# Altium PCB emulator_adapter.PcbDoc
Units mil, origin at the board's own origin, x right, y up, seen from the top; angles counter-clockwise.
Board outline 1696.85 x 4409.45 mil, 4 copper layers (Top Layer, Internal Plane 1, Internal Plane 2, Bottom Layer); 7 components, 53 nets, 163 pads, 79 vias.
Unrouted connection lines stored in the file: 56.
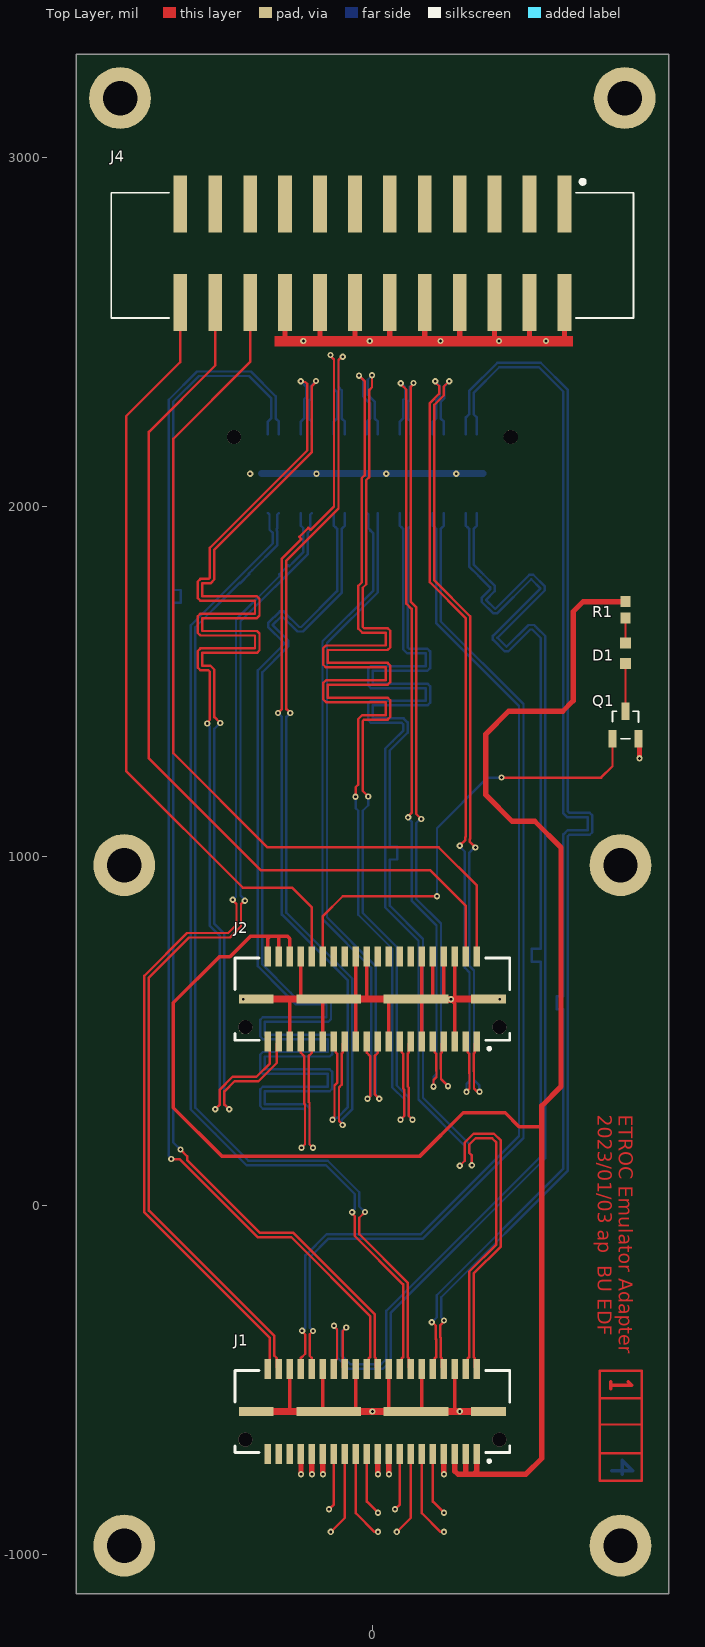
[diagram p0: Top Layer view]
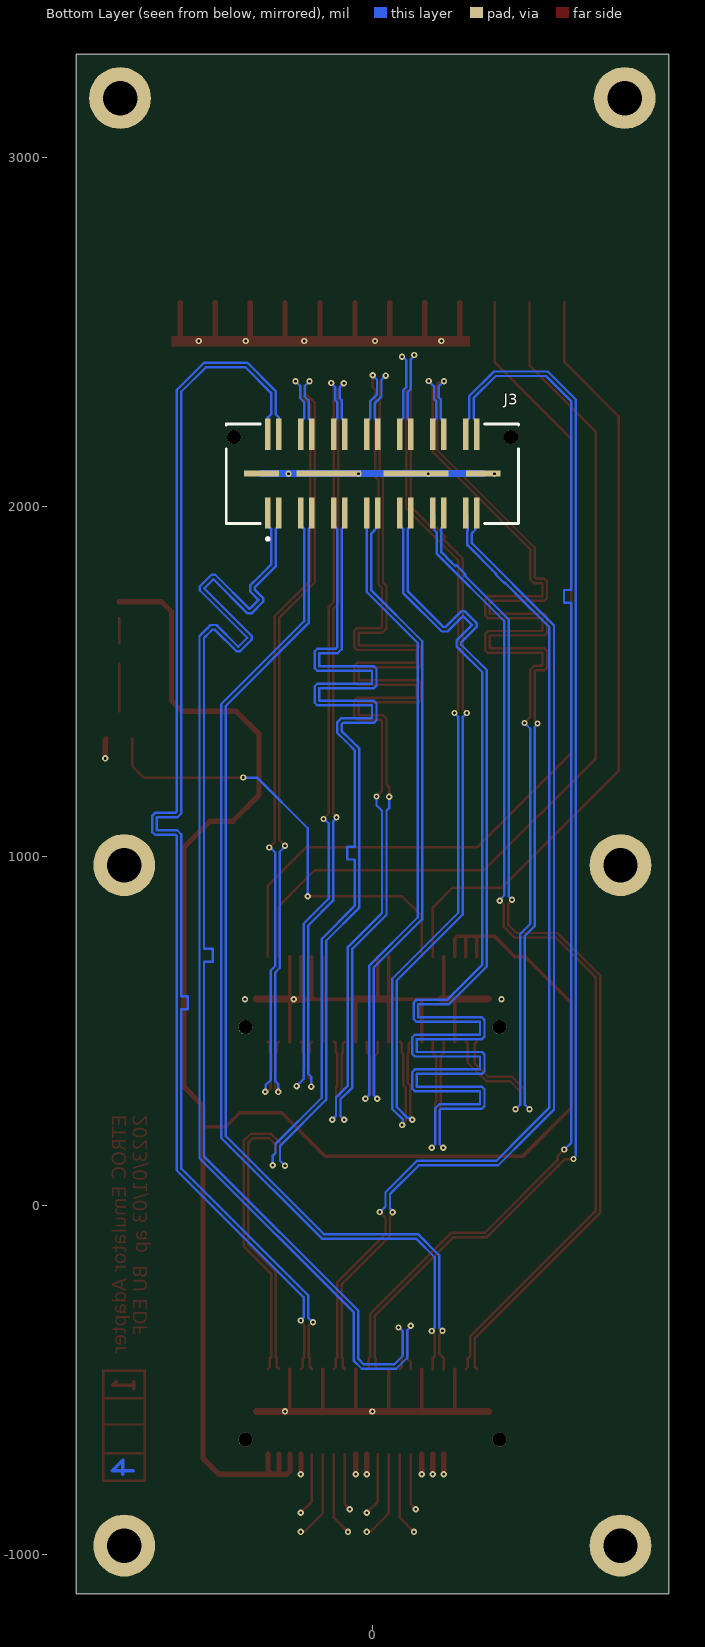
[diagram p1: Bottom Layer view, seen from below]
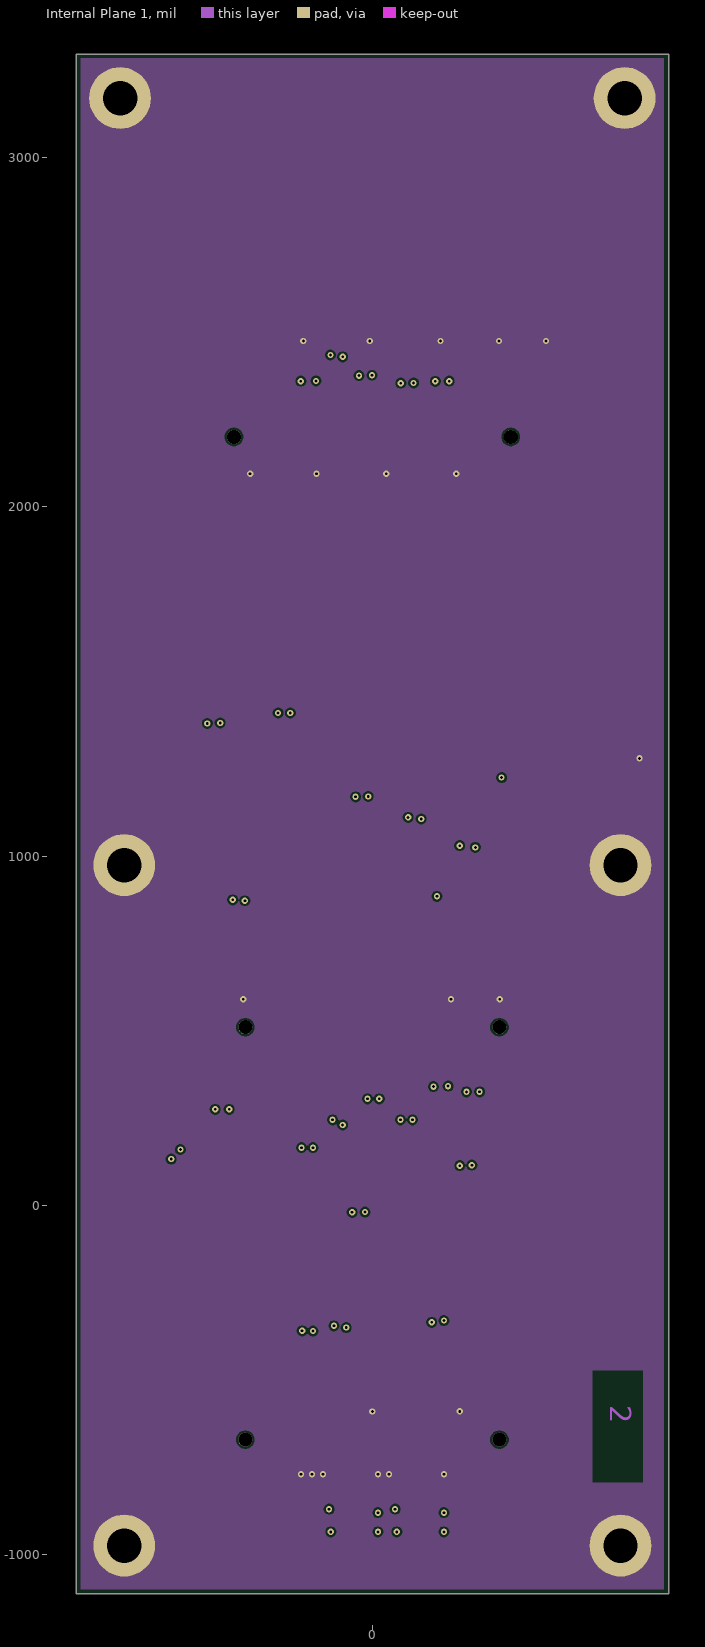
[diagram p2: Internal Plane 1]
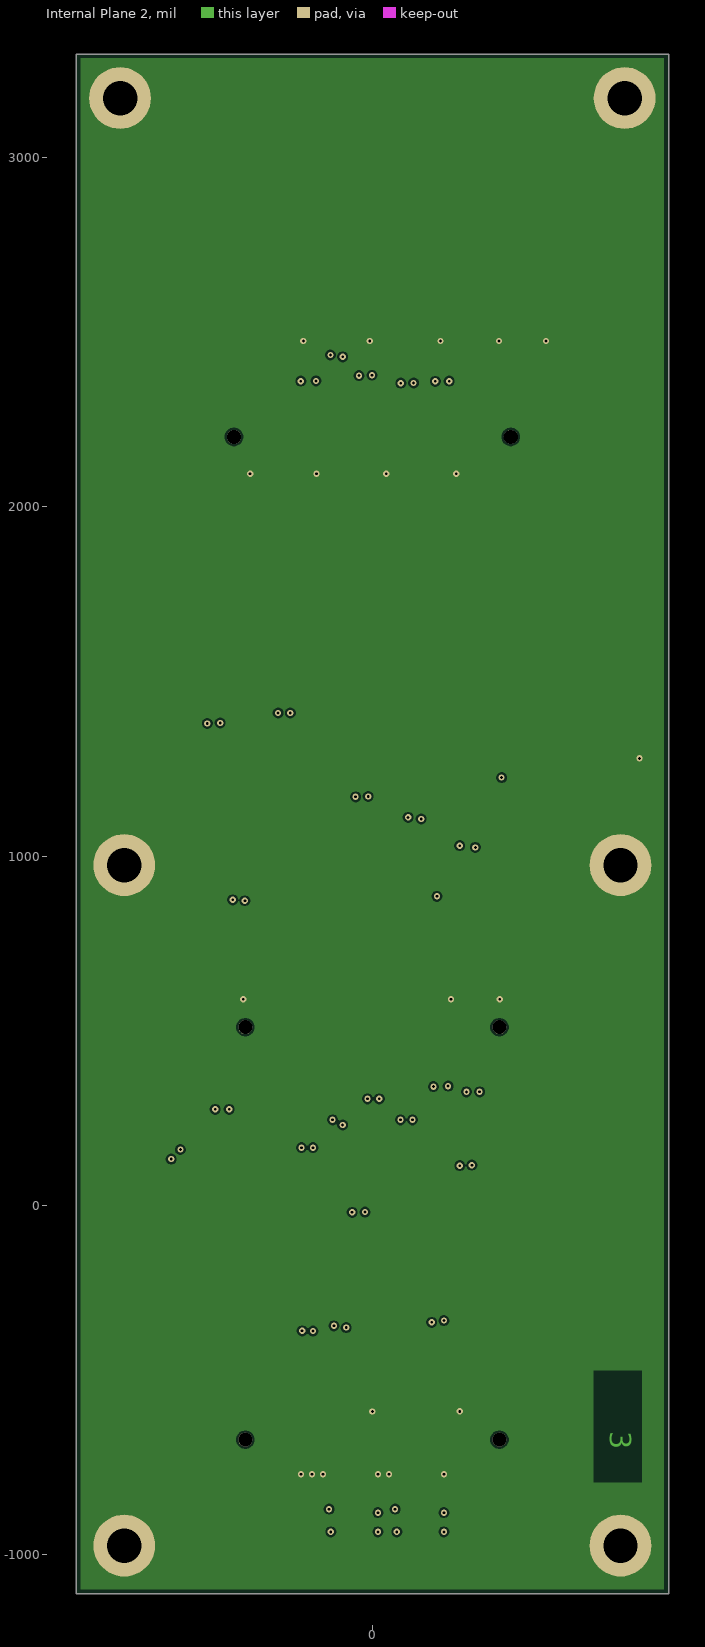
[diagram p3: Internal Plane 2]
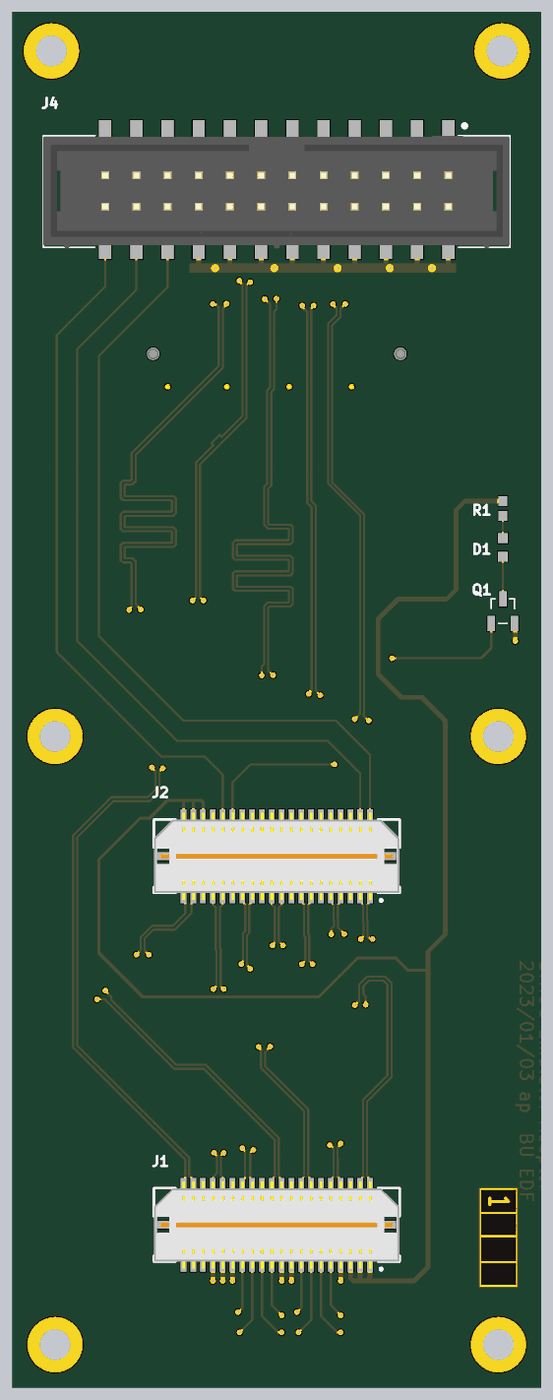
[diagram p4: 3D render of the assembled board from above, using the file's embedded part models]

## Layer stack, top to bottom
Top Solder: solder mask 0.4, Solder Resist, Dk 3.5
Top Layer: signal copper 1.4
Dielectric 1: dielectric 12.6, FR-4, Dk 4.8
Internal Plane 1: signal copper 1.4
Dielectric 2: dielectric 12.6, FR-4, Dk 4.8
Internal Plane 2: signal copper 1.4
Dielectric 3: dielectric 12.6, FR-4, Dk 4.8
Bottom Layer: signal copper 1.4
Bottom Solder: solder mask 0.4, Solder Resist, Dk 3.5

## Board outline
-848.42,-1112.68 848.43,-1112.68 848.43,3296.77 -848.42,3296.77

## Design rules (kind name [scope] priority, off if disabled: settings)
Clearance [All] p1: gap=6 ignorepadtopadclearanceinfootprint=TRUE
DiffPairsRouting [All] p1: maxlimit=10 minlimit=6 mostfreqgap=10 toplayer_maxgap=6 toplayer_prefgap=6 toplayer_minwidth=6.89 toplayer_maxwidth=6.89 toplayer_prefwidth=6.89 midlayer1_mingap=10 midlayer1_minwidth=15 midlayer1_maxwidth=15 midlayer1_prefwidth=15 midlayer2_mingap=10 midlayer2_minwidth=15 midlayer2_maxwidth=15 midlayer2_prefwidth=15 bottomlayer_maxgap=6 bottomlayer_prefgap=6 bottomlayer_minwidth=6.89 bottomlayer_maxwidth=6.89 bottomlayer_prefwidth=6.89 maxuncoupledlength=500
MatchedLengths "Diff Pairs" [All] p1: tolerance=25 checknetsindiffpair=TRUE checkdiffpairvsdiffpair=FALSE checkxsignals=FALSE checkothers=FALSE
MatchedLengths Downlinks [InNet('dout*')  OR InNet('clk*')] p2: tolerance=100 checknetsindiffpair=FALSE checkdiffpairvsdiffpair=TRUE checkxsignals=TRUE checkothers=TRUE
MinimumSolderMaskSliver [All] p1: minsoldermaskwidth=5
NetAntennae [Not(InNet('a0') or InNet('a1') or InNet('a2') or InNet('a3') or InNet('a4') or InNet('a5') or InNet('a6') or InNet('a7') or InNet('d0') or InNet('d1') or InNet('d2') or InNet('d3') or InNet('d4') or InNet('d5') or InNet('d6') or InNet('d7') )] p1: netantennaetolerance=0
PlaneConnect CAM_$Net_26 [InNet('$Net0')] p1: pad.planeconnectstyle=Relief pad.reliefexpansion=15 pad.reliefentries=4 pad.reliefconductorwidth=10 pad.reliefairgap=10 via.planeconnectstyle=Relief via.reliefexpansion=20 via.reliefentries=4 via.reliefconductorwidth=10 via.reliefairgap=10
PlaneConnect CAM_$Net_25 [InNet('$Net0')] p2: pad.planeconnectstyle=Relief pad.reliefexpansion=15 pad.reliefentries=4 pad.reliefconductorwidth=10 pad.reliefairgap=10 via.planeconnectstyle=Relief via.reliefexpansion=20 via.reliefentries=4 via.reliefconductorwidth=10 via.reliefairgap=10
PlaneConnect CAM_$Net_24 [InNet('$Net0')] p3: planeconnectstyle=Relief reliefexpansion=20 reliefentries=4 reliefconductorwidth=10 reliefairgap=10
PlaneConnect CAM_$Net_23 [InNet('$Net0')] p4: pad.planeconnectstyle=Relief pad.reliefexpansion=15 pad.reliefentries=4 pad.reliefconductorwidth=10 pad.reliefairgap=10 via.planeconnectstyle=Relief via.reliefexpansion=20 via.reliefentries=4 via.reliefconductorwidth=10 via.reliefairgap=10
PlaneConnect CAM_$Net_22 [InNet('$Net0')] p5: pad.planeconnectstyle=Relief pad.reliefexpansion=15 pad.reliefentries=4 pad.reliefconductorwidth=10 pad.reliefairgap=10 via.planeconnectstyle=Relief via.reliefexpansion=20 via.reliefentries=4 via.reliefconductorwidth=10 via.reliefairgap=10
PlaneConnect CAM_$Net_21 [InNet('$Net0')] p6: planeconnectstyle=Relief reliefexpansion=20 reliefentries=4 reliefconductorwidth=10 reliefairgap=10
PlaneConnect CAM_$Net_20 [InNet('$Net0')] p7: pad.planeconnectstyle=Relief pad.reliefexpansion=15 pad.reliefentries=4 pad.reliefconductorwidth=10 pad.reliefairgap=10 via.planeconnectstyle=Relief via.reliefexpansion=20 via.reliefentries=4 via.reliefconductorwidth=10 via.reliefairgap=10
PlaneConnect CAM_$Net_19 [InNet('$Net0')] p8: pad.planeconnectstyle=Relief pad.reliefexpansion=15 pad.reliefentries=4 pad.reliefconductorwidth=10 pad.reliefairgap=10 via.planeconnectstyle=Relief via.reliefexpansion=20 via.reliefentries=4 via.reliefconductorwidth=10 via.reliefairgap=10
PlaneConnect CAM_$Net_18 [InNet('$Net0')] p9: planeconnectstyle=Relief reliefexpansion=20 reliefentries=4 reliefconductorwidth=10 reliefairgap=10
PlaneConnect CAM_$Net_17 [InNet('$Net0')] p10: pad.planeconnectstyle=Relief pad.reliefexpansion=15 pad.reliefentries=4 pad.reliefconductorwidth=10 pad.reliefairgap=10 via.planeconnectstyle=Relief via.reliefexpansion=20 via.reliefentries=4 via.reliefconductorwidth=10 via.reliefairgap=10
PlaneConnect CAM_$Net_16 [InNet('$Net0')] p11: pad.planeconnectstyle=Relief pad.reliefexpansion=15 pad.reliefentries=4 pad.reliefconductorwidth=10 pad.reliefairgap=10 via.planeconnectstyle=Relief via.reliefexpansion=20 via.reliefentries=4 via.reliefconductorwidth=10 via.reliefairgap=10
PlaneConnect CAM_$Net_15 [InNet('$Net0')] p12: planeconnectstyle=Relief reliefexpansion=20 reliefentries=4 reliefconductorwidth=10 reliefairgap=10
PlaneConnect CAM_$Net_14 [InNet('$Net0')] p13: pad.planeconnectstyle=Relief pad.reliefexpansion=15 pad.reliefentries=4 pad.reliefconductorwidth=10 pad.reliefairgap=10 via.planeconnectstyle=Relief via.reliefexpansion=20 via.reliefentries=4 via.reliefconductorwidth=10 via.reliefairgap=10
PlaneConnect CAM_$Net_13 [InNet('$Net0')] p14: pad.planeconnectstyle=Relief pad.reliefexpansion=15 pad.reliefentries=4 pad.reliefconductorwidth=10 pad.reliefairgap=10 via.planeconnectstyle=Relief via.reliefexpansion=20 via.reliefentries=4 via.reliefconductorwidth=10 via.reliefairgap=10
PlaneConnect CAM_$Net_12 [InNet('$Net0')] p15: planeconnectstyle=Relief reliefexpansion=20 reliefentries=4 reliefconductorwidth=10 reliefairgap=10
PlaneConnect CAM_$Net_11 [InNet('$Net0')] p16: pad.planeconnectstyle=Relief pad.reliefexpansion=15 pad.reliefentries=4 pad.reliefconductorwidth=10 pad.reliefairgap=10 via.planeconnectstyle=Relief via.reliefexpansion=20 via.reliefentries=4 via.reliefconductorwidth=10 via.reliefairgap=10
PlaneConnect CAM_$Net_10 [InNet('$Net0')] p17: pad.planeconnectstyle=Relief pad.reliefexpansion=15 pad.reliefentries=4 pad.reliefconductorwidth=10 pad.reliefairgap=10 via.planeconnectstyle=Relief via.reliefexpansion=20 via.reliefentries=4 via.reliefconductorwidth=10 via.reliefairgap=10
PlaneConnect CAM_$Net_9 [InNet('$Net0')] p18: planeconnectstyle=Relief reliefexpansion=20 reliefentries=4 reliefconductorwidth=10 reliefairgap=10
PlaneConnect CAM_$Net_8 [InNet('$Net0')] p19: pad.planeconnectstyle=Relief pad.reliefexpansion=15 pad.reliefentries=4 pad.reliefconductorwidth=10 pad.reliefairgap=10 via.planeconnectstyle=Relief via.reliefexpansion=20 via.reliefentries=4 via.reliefconductorwidth=10 via.reliefairgap=10
PlaneConnect CAM_$Net_7 [InNet('$Net0')] p20: pad.planeconnectstyle=Relief pad.reliefexpansion=15 pad.reliefentries=4 pad.reliefconductorwidth=10 pad.reliefairgap=10 via.planeconnectstyle=Relief via.reliefexpansion=20 via.reliefentries=4 via.reliefconductorwidth=10 via.reliefairgap=10
PlaneConnect CAM_$Net_6 [InNet('$Net0')] p21: planeconnectstyle=Relief reliefexpansion=20 reliefentries=4 reliefconductorwidth=10 reliefairgap=10
PlaneConnect CAM_$Net_5 [InNet('$Net0')] p22: pad.planeconnectstyle=Relief pad.reliefexpansion=15 pad.reliefentries=4 pad.reliefconductorwidth=10 pad.reliefairgap=10 via.planeconnectstyle=Relief via.reliefexpansion=20 via.reliefentries=4 via.reliefconductorwidth=10 via.reliefairgap=10
PlaneConnect CAM_$Net_4 [InNet('$Net0')] p23: pad.planeconnectstyle=Relief pad.reliefexpansion=15 pad.reliefentries=4 pad.reliefconductorwidth=10 pad.reliefairgap=10 via.planeconnectstyle=Relief via.reliefexpansion=20 via.reliefentries=4 via.reliefconductorwidth=10 via.reliefairgap=10
PlaneConnect CAM_$Net_3 [InNet('$Net0')] p24: planeconnectstyle=Relief reliefexpansion=20 reliefentries=4 reliefconductorwidth=10 reliefairgap=10
PlaneConnect CAM_$Net_2 [InNet('$Net0')] p25: pad.planeconnectstyle=Relief pad.reliefexpansion=15 pad.reliefentries=4 pad.reliefconductorwidth=10 pad.reliefairgap=10 via.planeconnectstyle=Relief via.reliefexpansion=20 via.reliefentries=4 via.reliefconductorwidth=10 via.reliefairgap=10
PlaneConnect CAM_$Net_1 [InNet('$Net0')] p26: pad.planeconnectstyle=Relief pad.reliefexpansion=15 pad.reliefentries=4 pad.reliefconductorwidth=10 pad.reliefairgap=10 via.planeconnectstyle=Relief via.reliefexpansion=20 via.reliefentries=4 via.reliefconductorwidth=10 via.reliefairgap=10
PlaneConnect CAM_$Net0 [InNet('$Net0')] p27: planeconnectstyle=Relief reliefexpansion=20 reliefentries=4 reliefconductorwidth=10 reliefairgap=10
PlaneConnect [All] p28: planeconnectstyle=Relief reliefexpansion=20 reliefentries=4 reliefconductorwidth=10 reliefairgap=10
PolygonConnect CAM_PolygonConnect_$Net39 [InNet('$Net39')] p1: connectstyle=Direct reliefconductorwidth=10 reliefentries=4 polygonreliefangle="90 Angle" airgapwidth=10
PolygonConnect CAM_PolygonConnect_$Net40 [InNet('$Net40')] p2: connectstyle=Direct reliefconductorwidth=10 reliefentries=4 polygonreliefangle="90 Angle" airgapwidth=10
PolygonConnect [All] p3: connectstyle=Direct reliefconductorwidth=10 reliefentries=4 polygonreliefangle="90 Angle" airgapwidth=10
RoutingVias [All] p1: holewidth=8 width=18 viastyle="Through Hole" minholewidth=8 minwidth=18 maxholewidth=8 maxwidth=18
SilkToSolderMaskClearance [IsPad] p1: minsilkscreentomaskgap=6 clearancetoexposedcopper=TRUE
SolderMaskExpansion [All] p1: expansion=4 istentingtop=FALSE
Width [All] p1: maxlimit=30 minlimit=6.89 preferedwidth=6.89
25 further rules are at their usual default settings.

## Classes and differential pairs
net class Dout_1: clk2_n clk2_p clk3_n clk3_p dout1_n dout1_p
net class Din_T_1: tin0_n tin0_p tin1_n tin1_p
net class Din_1: din1_n din1_p din2_n din2_p
differential pair tin3: +tin3_p -tin3_n
differential pair tin2: +tin2_p -tin2_n
differential pair tin1: +tin1_p -tin1_n
differential pair tin0: +tin0_p -tin0_n
differential pair dout1: +dout1_p -dout1_n
differential pair dout0: +dout0_p -dout0_n
differential pair din3: +din3_p -din3_n
differential pair din2: +din2_p -din2_n
differential pair din1: +din1_p -din1_n
differential pair din0: +din0_p -din0_n
differential pair clk3: +clk3_p -clk3_n
differential pair clk2: +clk2_p -clk2_n
differential pair clk1: +clk1_p -clk1_n
differential pair clk0: +clk0_p -clk0_n

## Components (designator, comment, footprint, x,y, rotation, side; value= is the part's Value field where it differs from the comment)
D1 "LTST-C191KRKT" LED_RED 725,1610 r270 top
J1 "QTE-020-01-L-D-A" SAMTEC_QTE-020-01-L-D-A-FL-K-TR 0,-590.55 r180 top locked
J2 "QTE-020-01-L-D-A" SAMTEC_QTE-020-01-L-D-A-FL-K-TR 0,590.55 r180 top locked
J3 "QSE-014-01-X-D-DP-A-RT1" SAMTEC_QSE-014-01-F-D-DP-A 0,2095.3 r180 bottom locked
J4 "SBH11-NBPC-D12-SM-BK" SULLINS_SBH11-NBPC-D12-SM-BK 0,2726.38 r180 top locked
Q1 "ZXMN2B01FTA" SOT-23 687.6,1336.26 r0 top
R1 "ERJ-2GEJ201X" resc1005n 725,1705 r90 top

## Footprints (in the part's own frame and the unit in brackets; to place one, negate y for a bottom-side part, rotate by r counter-clockwise, add the part's x,y. Pads: shape width x height; smd on the part's side, far side on the other; paste and mask are expansions set on the pad)
LED_RED [mm] "LTST-C194KRKT"
  rect 0.8x0.8 smd: 1(0,0) 2(1.5,0)
  body extent -0.1,-0.45 1.6,0.45, height 0.6
resc1005n [mm] "Chip Resistor, Body 1.1x0.5mm, IPC Medium Density"
  rect 0.8x0.7 smd: 1(-0.6,0) 2(0.6,0)
  body extent -0.55,-0.3 0.55,0.3, height 0.4
SAMTEC_QSE-014-01-F-D-DP-A [mm]
  rect 0.41x2.27 smd: 01(-7.6,-2.865) 02(-7.6,2.865) 03(-6.8,-2.865) 04(-6.8,2.865) 05(-5.2,-2.865) 06(-5.2,2.865) 07(-4.4,-2.865) 08(-4.4,2.865) 09(-2.8,-2.865) 10(-2.8,2.865) 11(-2,-2.865) 12(-2,2.865) 13(-0.4,-2.865) 14(-0.4,2.865) 15(0.4,-2.865) 16(0.4,2.865) 17(2,-2.865) 18(2,2.865) 19(2.8,-2.865) 20(2.8,2.865) 21(4.4,-2.865) 22(4.4,2.865) 23(5.2,-2.865) 24(5.2,2.865) 25(6.8,-2.865) 26(6.8,2.865) 27(7.6,-2.865) 28(7.6,2.865)
  rect 2.54x0.43 smd: G1(-8.065,0) G4(8.065,0)
  rect 4.7x0.43 smd: G2(-3.175,0) G3(3.175,0)
  round 1.02 hole 1.02 unplated: ""(-10.065,2.67) ""(10.065,2.67)
  silkscreen extent -10.64,-4.85 10.64,3.62, body extent -10.64,-3.75 10.64,3.75, height 3.05
SAMTEC_QTE-020-01-L-D-A-FL-K-TR [mm]
  rect 0.46x1.45 smd: 01(-7.6,3.09) 02(-7.6,-3.09) 03(-6.8,3.09) 04(-6.8,-3.09) 05(-6,3.09) 06(-6,-3.09) 07(-5.2,3.09) 08(-5.2,-3.09) 09(-4.4,3.09) 10(-4.4,-3.09) 11(-3.6,3.09) 12(-3.6,-3.09) 13(-2.8,3.09) 14(-2.8,-3.09) 15(-2,3.09) 16(-2,-3.09) 17(-1.2,3.09) 18(-1.2,-3.09) 19(-0.4,3.09) 20(-0.4,-3.09) 21(0.4,3.09) 22(0.4,-3.09) 23(1.2,3.09) 24(1.2,-3.09) 25(2,3.09) 26(2,-3.09) 27(2.8,3.09) 28(2.8,-3.09) 29(3.6,3.09) 30(3.6,-3.09) 31(4.4,3.09) 32(4.4,-3.09) 33(5.2,3.09) 34(5.2,-3.09) 35(6,3.09) 36(6,-3.09) 37(6.8,3.09) 38(6.8,-3.09) 39(7.6,3.09) 40(7.6,-3.09)
  rect 2.54x0.64 smd: G1(-8.445,0) G4(8.445,0)
  rect 4.7x0.64 smd: G2(-3.175,0) G3(3.175,0)
  round 1.02 hole 1.02 unplated: ""(-9.24,2.04) ""(9.24,2.04)
  silkscreen extent -10,-2.98 10,3.7, body extent -10.01,-3.56 10.01,3.56, height 4.06
SOT-23 [mm]
  rect 0.6x1.25 smd: 1(0,0) 2(1.9,0) 3(0.95,2)
  silkscreen extent 0,0 1.9,2, body extent 0,0.3 1.9,1.7, height 1.2
SULLINS_SBH11-NBPC-D12-SM-BK [mm]
  rect 1x4.15 smd: 1(-13.97,-3.575) 2(-13.97,3.575) 3(-11.43,-3.575) 4(-11.43,3.575) 5(-8.89,-3.575) 6(-8.89,3.575) 7(-6.35,-3.575) 8(-6.35,3.575) 9(-3.81,-3.575) 10(-3.81,3.575) 11(-1.27,-3.575) 12(-1.27,3.575) 13(1.27,-3.575) 14(1.27,3.575) 15(3.81,-3.575) 16(3.81,3.575) 17(6.35,-3.575) 18(6.35,3.575) 19(8.89,-3.575) 20(8.89,3.575) 21(11.43,-3.575) 22(11.43,3.575) 23(13.97,-3.575) 24(13.97,3.575)
  silkscreen extent -18.99,-5.34 18.99,4.7, body extent -18.99,-5.05 18.99,5.25, height 8.8

## Part data
D1: library part LED_RED, "Typical RED, GREEN, YELLOW, AMBER GaAs LED", LatestRevisionDate=17-Jul-2002, LatestRevisionNote="Re-released for DXP Platform.", PackageDescription="SM LED; 2 Flat Leads", PackageReference=3.2X1.6X1.1, PackageVersion=Feb-2002, Published=8-Jun-2000, Publisher="Altium Limited"
J1 J2: library part QTE-020-01-XXX-D, "40 Position Connector Receptacle, Center Strip Contacts Surface Mount Gold", Package="MAPBGA-624 Samtec", Availability=Bad, MF=Samtec, MP=QSE-020-01-F-D, Price=None, SnapEDA_Link=https://www.snapeda.com/parts/QSE-020-01-F-D/Samtec/view-part/1737145/?ref=snap, Toby_UK-Purchase-URL=https://snapeda.com/shop?store=Toby+UK&id=1737145
J3: library part QSE-014-01-XXX-D, "28 Position Connector Receptacle, Center Strip Contacts Surface Mount Gold", Package="MAPBGA-624 Samtec", Availability=Bad, MF=Samtec, MP=QSE-020-01-F-D, Price=None, SnapEDA_Link=https://www.snapeda.com/parts/QSE-020-01-F-D/Samtec/view-part/1737145/?ref=snap, Toby_UK-Purchase-URL=https://snapeda.com/shop?store=Toby+UK&id=1737145
J4: library part "Header 12X2", "Header, 24-Pin, Dual row", LatestRevisionDate=17-Jul-2002, LatestRevisionNote="Re-released for DXP Platform.", Publisher="Altium Limited"
Q1: "MOSFET N-CH 20V 2.1A SOT-23-3", ComponentLink2Description=Datasheet, ComponentLink2URL=https://www.diodes.com/assets/Datasheets/ZXMN2B01F.pdf
R1: library part R1, "FILM RESISTOR", Parameter 1=1K, Text Field2=5%

## Free pads (board coordinates)
  round 177.17 hole 98.43: M(-722.44,3170.79) M(-710.63,-974.41) M(-710.63,974.41) M(710.63,-974.41) M(710.63,974.41) M(722.44,3170.79)

## Via types
v1: diameter 18, hole 8, Top Layer to Bottom Layer, 79 vias

## Nets (pads, with @x,y where several pads share a name; then routed paths per layer and width w, separated by ;. In a path a pad name is that pad's centre, name@x,y a point inside that pad or via, vN(x,y) a via of type N, cw(c..) or ccw(c..) an arc to the next point about the centre after c; other vN are vias at no path point)
a0: J2.20
a1: J2.18
a2: J2.16
a3: J2.14
a4: J1.21 | length 181
  Top Layer w6.89: J1.21 -15.75,-848.23 v1(16.02,-880)
a5: J1.23 | length 254.9
  Top Layer w6.89: J1.23 -47.24,-881.73 6.02,-935 v1(16.02,-935)
a6: J1.25 | length 239.5
  Top Layer w6.89: v1(-118.98,-935) -78.74,-894.76 J1.25
a7: J1.27 | length 163.5
  Top Layer w6.89: v1(-123.98,-870) -110.24,-856.26 J1.27
addr2: J1.39
addr3: J1.37
addr4: J1.35
clk0_n: J1.28 J3.01 | length 3572
  Top Layer w6.89: J1.28 -110.24,-449.41 -101.24,-440.41 -101.24,-354.59 -110,-345.83 v1(-110,-345)
  Bottom Layer w6.89: v1(-110,-345) -110,-347.5 -99.98,-357.52 -99.98,-366.72 -100,-436.2 -68.31,-467.89 30.34,-467.89 52.89,-445.34 52.89,-307.11 495,135 495,1629.97 471.93,1653.04 466.83,1658.14 463.05,1661.92 446.67,1661.92 384.15,1599.4 358.06,1625.49 494.14,1761.57 494.14,1772.25 460.51,1805.88 449.83,1805.88 351.81,1707.87 325.73,1733.95 350.18,1758.4 350.18,1774.79 317.59,1807.38 312.49,1812.49 289.97,1835 289.91,1835.06 289.91,1886.15 289.91,1937.23 293.95,1941.27 294.59,1941.27 299.21,1945.89 J3.01
clk0_p: J1.26 J3.03 | length 3571.6
  Top Layer w6.89: J1.26 -84.35,-463.29 -84.35,-440.41 -85,-439.76 -85,-360 v1(-75,-350)
  Bottom Layer w6.89: -87.11,-372.08 -87.11,-430.86 -62.97,-455 25,-455 40,-440 40,-301.77 482.11,140.34 482.11,670 482.11,697.77 456.82,697.77 456.82,734.66 482.11,734.66 482.11,775 482.11,1624.63 462.82,1643.92 457.71,1649.03 452,1649.03 389.49,1586.51 378.81,1586.51 345.17,1620.15 345.17,1630.83 481.25,1766.91 455.17,1792.99 357.15,1694.98 346.48,1694.98 312.84,1728.61 312.84,1739.29 337.29,1763.74 337.29,1769.45 308.48,1798.27 303.37,1803.37 277.02,1829.72 277.02,1937.23 272.98,1941.27 272.34,1941.27 267.72,1945.89 J3.03 ; -87.09,-372.06 -87.09,-359.59 -77.5,-350 v1(-75,-350)
clk1_n: J1.04 J3.09 | length 3500.5
  Top Layer w6.89: J1.04 273.33,-463.29 273.33,-438.17 277.02,-434.48 277.02,-190.29 355,-112.31 355,180 342.89,192.11 295.34,192.11 277.44,174.22 277.44,149.89 285,142.33 v1(285,115)
  Bottom Layer w6.89: J3.09 110.24,1945.89 105.61,1941.27 104.97,1941.27 100.93,1937.23 100.93,1835 100.93,1770 100.93,1605 100.93,1597.78 104.97,1593.74 157.64,1593.74 165.19,1586.19 165.19,1538.62 157.64,1531.07 0.93,1531.07 0.93,1494.18 157.64,1494.18 165.19,1486.63 165.19,1439.06 157.64,1431.51 0.93,1431.51 0.93,1394.62 89.35,1394.62 100.93,1383.04 100.93,1353.4 76.36,1328.82 50,1302.46 50,1050 50,1027.23 71.36,1027.23 71.36,990.34 50,990.34 50,950 50,858.23 145,763.23 145,308.23 277.44,175.79 277.44,149.89 285,142.33 v1(285,115)
clk1_p: J1.02 J3.11 | length 3508.8
  Top Layer w6.89: v1(250.25,113.6) 264.56,127.91 264.56,179.55 290,205 348.23,205 367.89,185.34 367.89,-117.65 289.91,-195.63 289.91,-434.48 293.6,-438.17 293.6,-463.29 J1.02
  Bottom Layer w6.89: J3.11 78.74,1945.89 83.37,1941.27 84.01,1941.27 88.04,1937.23 88.04,1605 88.04,1592.44 99.63,1580.85 152.3,1580.85 152.3,1543.96 -4.41,1543.96 -11.96,1536.41 -11.96,1488.84 -4.41,1481.29 152.3,1481.29 152.3,1444.4 -4.41,1444.4 -11.96,1436.85 -11.96,1389.28 -4.41,1381.73 84.01,1381.73 88.04,1377.7 88.04,1358.74 58.13,1328.82 37.11,1307.8 37.11,852.89 132.11,757.89 132.11,302.9 264.56,170.45 264.56,127.91 v1(250.25,113.6)
clk2_n: J2.13 J3.14 | length 3477.5
  Top Layer w6.89: v1(-11.84,1170.95) -27.55,1186.66 -27.55,1359.68 -27.55,1387.11 -23.52,1391.15 43.82,1391.15 51.37,1398.7 51.37,1446.27 43.82,1453.82 -127.55,1453.82 -127.55,1490.71 43.82,1490.71 51.37,1498.26 51.37,1545.83 43.82,1553.38 -127.55,1553.38 -127.55,1590.27 43.82,1590.27 51.37,1597.82 51.37,1645.39 43.82,1652.94 -23.52,1652.94 -27.55,1656.97 -27.55,1664.19 -27.55,1768.61 -17.55,1778.61 -17.55,2077.11 -8.52,2086.15 -8.52,2335 -0.96,2342.56 v1(-0.96,2377.1) ; J2.13 104.63,463.29 104.63,438.17 100.93,434.48 100.93,340.26 104.19,337.01 104.19,255.81 v1(115,245)
  Bottom Layer w6.89: v1(-11.84,1170.95) -11.84,1145.71 -27.55,1130 -27.55,837.56 70,740 70,343.23 104.19,309.04 104.19,255.81 v1(115,245) ; v1(-0.96,2377.1) -0.96,2376.53 -13.19,2364.31 -13.19,2321.64 6.44,2302.01 6.44,2253.37 10.48,2249.34 11.12,2249.34 15.75,2244.71 J3.14
clk2_p: J2.15 J3.16 | length 3472.6
  Top Layer w6.89: v1(-48,1170) -48,1197.45 -40.44,1205 -40.44,1359.68 -40.44,1392.45 -28.86,1404.04 38.48,1404.04 38.48,1440.93 -132.89,1440.93 -140.44,1448.48 -140.44,1496.05 -132.89,1503.6 38.48,1503.6 38.48,1540.49 -132.89,1540.49 -140.44,1548.04 -140.44,1595.61 -132.89,1603.16 38.48,1603.16 38.48,1640.05 -28.86,1640.05 -40.44,1651.63 -40.44,1664.19 -40.44,1773.95 -30.44,1783.95 -30.44,2082.45 -21.41,2091.49 -21.41,2359.07 v1(-38.3,2375.96) ; J2.15 84.35,463.29 84.35,438.17 88.04,434.48 88.04,334.92 91.3,331.67 91.3,255.81 v1(80.49,245)
  Bottom Layer w6.89: v1(-48,1170) -48,1137.55 -40.44,1130 -40.44,832.22 57.11,734.66 57.11,337.89 91.3,303.7 91.3,255.81 v1(80.49,245) ; v1(-38.3,2375.96) -37.73,2375.96 -26.08,2364.31 -26.08,2316.3 -6.44,2296.67 -6.44,2253.37 -10.48,2249.34 -11.12,2249.34 -15.75,2244.71 J3.16
clk3_n: J2.37 J3.22 | length 3401.9
  Top Layer w6.89: v1(-435.7,1381.4) -452.33,1398.03 -452.33,1520.99 -452.33,1533.55 -463.92,1545.14 -487.18,1545.14 -487.18,1582.03 -330.69,1582.03 -323.14,1589.58 -323.14,1637.15 -330.69,1644.7 -487.18,1644.7 -487.18,1681.59 -330.69,1681.59 -323.14,1689.14 -323.14,1736.71 -330.69,1744.26 -487.18,1744.26 -487.18,1781.15 -463.92,1781.15 -452.33,1792.73 -452.33,1845.95 -452.33,1877.67 -173.1,2156.9 -173.1,2346.17 -161.47,2357.8 v1(-161.47,2360.8) ; v1(-410,275) -423.55,288.55 -423.55,326.45 -394.68,355.32 -326.45,355.32 -273.33,408.44 -273.33,463.29 J2.37
  Bottom Layer w6.89: v1(-435.7,1381.4) -452.33,1364.77 -452.33,805.56 -423.55,776.78 -423.55,288.55 v1(-410,275) ; J3.22 -173.23,2244.71 -177.85,2249.34 -178.5,2249.34 -182.53,2253.37 -182.53,2303.1 -176.79,2308.85 -176.79,2345.08 -161.47,2360.4 v1(-161.47,2360.8)
clk3_p: J2.39 J3.24 | length 3399.3
  Top Layer w6.89: v1(-472.77,1380) -472.77,1383.01 -465.22,1390.56 -465.22,1450 -465.22,1520.99 -465.22,1528.21 -469.26,1532.25 -492.52,1532.25 -500.07,1539.8 -500.07,1587.37 -492.52,1594.92 -336.03,1594.92 -336.03,1631.81 -492.52,1631.81 -500.07,1639.36 -500.07,1686.93 -492.52,1694.48 -336.03,1694.48 -336.03,1731.37 -492.52,1731.37 -500.07,1738.92 -500.07,1786.49 -492.52,1794.04 -469.26,1794.04 -465.22,1798.07 -465.22,1845.95 -465.22,1883.01 -185.99,2162.24 -185.99,2351.67 -192.19,2357.87 -202.87,2357.87 v1(-205,2360) ; v1(-450,275) -436.44,288.55 -436.44,331.78 -400.02,368.21 -331.79,368.21 -293.6,406.4 -293.6,463.29 J2.39
  Bottom Layer w6.89: v1(-472.77,1380) -472.77,1376.99 -465.22,1369.44 -465.22,1015 -465.22,990 -465.22,800.22 -436.44,771.45 -436.44,288.55 v1(-450,275) ; v1(-205,2360) -204.6,2360 -189.68,2345.08 -189.68,2314.18 -195.42,2308.44 -195.42,2253.37 -199.46,2249.34 -200.1,2249.34 -204.72,2244.71 J3.24
d0: J2.32 J4.24 | length 2240.5
  Top Layer w6.89: J4.24 -550,2414.75 -705,2259.75 -705,1243.98 -371.02,910 -230,910 -173.23,853.23 J2.32
d1: J2.30 Q1.1 | length 1316.1
  Top Layer w6.89: J2.30 -141.73,828.27 -85,885 v1(185,885) ; v1(370,1225) 655,1225 687.6,1257.6 Q1.1
  Bottom Layer w6.89: v1(185,885) 185,1080 330,1225 v1(370,1225)
d2: J2.28
d3: J2.26
d4: J1.09 | length 181
  Top Layer w6.89: J1.09 173.23,-848.23 v1(205,-880)
d5: J1.11 | length 254.9
  Top Layer w6.89: J1.11 141.73,-881.73 195,-935 v1(205,-935)
d6: J1.13 | length 239.5
  Top Layer w6.89: v1(70,-935) 110.24,-894.76 J1.13
d7: J1.15 | length 163.5
  Top Layer w6.89: v1(65,-870) 78.74,-856.26 J1.15
din0_n: J1.32 J3.05 | length 2975.4
  Top Layer w6.89: J1.32 -173.23,-436.91 -179.1,-431.04 -179.1,-369.1 v1(-170,-360)
  Bottom Layer w6.89: v1(-170,-360) -170,-358.7 -178.78,-349.93 -178.78,-148.78 -125.33,-95.33 144.67,-95.33 432.89,192.89 432.89,1435.34 195.42,1672.81 195.42,1815 195.42,1865 195.42,1937.23 199.46,1941.27 200.1,1941.27 204.72,1945.89 J3.05
din0_p: J1.34 J3.07 | length 2978.9
  Top Layer w6.89: J1.34 -204.72,-436.91 -203.9,-436.91 -191.99,-425 -191.99,-369.75 -201.09,-360.65 v1(-201.09,-359.35)
  Bottom Layer w6.89: v1(-201.09,-359.35) -191.67,-349.93 -191.67,-143.44 -130.67,-82.44 139.33,-82.44 420,198.23 420,1430 182.53,1667.47 182.53,1937.23 178.5,1941.27 177.85,1941.27 173.23,1945.89 J3.07
din1_n: J2.07 J3.10 | length 2372.6
  Top Layer w6.89: v1(118,2355) 118,2351.99 110.44,2344.44 110.44,1728.11 125.17,1713.38 125.17,1121.25 v1(139.89,1106.53) ; J2.07 199.11,463.29 199.11,438.17 195.42,434.48 195.42,391.78 196.43,390.77 196.43,361.89 v1(216.87,341.45)
  Bottom Layer w6.89: J3.10 110.24,2244.71 105.61,2249.34 104.97,2249.34 100.93,2253.37 100.93,2300.49 106.23,2305.78 106.23,2342.95 118,2354.73 v1(118,2355) ; v1(139.89,1106.53) 137.65,1106.53 125.17,1094.05 125.17,878.06 196.43,806.8 196.43,361.89 v1(216.87,341.45)
din1_p: J2.09 J3.12 | length 2364.5
  Top Layer w6.89: v1@81.9,2351.12 86.83,2346.18 97.56,2335.43 97.56,1722.77 112.28,1708.05 112.28,1123.84 102.44,1114.01 v1(102.44,1111) ; J2.09 178.84,463.29 178.84,438.17 182.53,434.48 182.53,386.44 183.54,385.43 183.54,367.86 175.02,359.34 175.02,340.04 v1(174.98,340)
  Bottom Layer w6.89: v1@77.48,2356.83 79.47,2356.83 93.34,2342.95 93.34,2311.12 88.04,2305.83 88.04,2253.37 84.01,2249.34 83.37,2249.34 78.74,2244.71 J3.12 ; v1(102.44,1111) 102.44,1108.77 112.28,1098.94 112.28,872.72 183.54,801.46 183.54,376.64 174.98,368.08 v1(174.98,340)
  other v1: 81.57,2354.45
din2_n: J2.25 J3.18 | length 2855.1
  Top Layer w6.89: v1(-235,1410) -246.05,1421.05 -246.05,1846.62 -97.09,1995.59 -97.09,2420.41 -87.5,2430 v1(-85,2430) ; v1(-85.2,230.2) -85.2,231.01 -95.55,241.36 -95.55,337.83 -88.04,345.34 -88.04,434.48 -84.35,438.17 -84.35,463.29 J2.25
  Bottom Layer w6.89: v1(-235,1410) -246.05,1398.95 -246.05,838.04 -57.11,649.1 -57.11,275.97 -87.33,245.75 -87.33,232.33 v1(-85.2,230.2) ; v1(-85,2430) -87.5,2430 -97.09,2420.41 -97.09,2343.09 -88.04,2334.04 -88.04,2253.37 -84.01,2249.34 -83.37,2249.34 -78.74,2244.71 J3.18
din2_p: J2.27 J3.20 | length 2856.4
  Top Layer w6.89: v1(-270,1410) -258.94,1421.05 -258.94,1851.96 -205.45,1905.45 -203.02,1907.89 -209.46,1914.33 -183.37,1940.41 -176.93,1933.98 -162.95,1947.95 -109.98,2000.93 -109.98,2422.48 -120,2432.5 v1(-120,2435) ; v1(-114,245) -114,248.01 -108.44,253.56 -108.44,343.17 -100.93,350.68 -100.93,434.48 -104.63,438.17 -104.63,463.29 J2.27
  Bottom Layer w6.89: v1(-270,1410) -258.94,1398.95 -258.94,832.7 -70,643.76 -70,281.31 -100.66,250.64 -105.35,250.64 -110.99,245 v1(-114,245) ; v1(-120,2435) -120,2432.5 -109.98,2422.48 -109.98,2337.75 -100.93,2328.7 -100.93,2253.37 -104.97,2249.34 -105.61,2249.34 -110.24,2244.71 J3.20
din3_n: J1.14 J3.25 | length 2957.3
  Top Layer w6.89: v1(-21.16,-19.3) -37.55,-35.7 -37.55,-82.44 100.93,-220.93 100.93,-434.48 104.63,-438.17 104.63,-463.29 J1.14
  Bottom Layer w6.89: J3.25 -272.34,1977.88 -272.34,1938.18 -273.29,1937.23 -273.29,1931.52 -272.11,1930.34 -272.11,1890.6 -343.85,1818.85 -354.25,1808.46 -353.05,1807.27 -379.14,1781.18 -380.33,1782.37 -406.42,1756.29 -408.85,1753.85 -507.11,1655.6 -507.11,280 -437.11,210 -355,127.89 -127.89,127.89 -37.55,37.56 -37.55,-2.91 v1(-21.16,-19.3)
din3_p: J1.16 J3.27 | length 2949.6
  Top Layer w6.89: v1(-58,-20) -58,-23.01 -50.44,-30.56 -50.44,-87.78 88.04,-226.27 88.04,-434.48 84.35,-438.17 84.35,-463.29 J1.16
  Bottom Layer w6.89: J3.27 -294.59,1977.88 -294.59,1934.59 -285,1925 -285,1895.93 -520,1660.93 -520,274.66 -450,204.66 -360.34,115 -133.23,115 -50.44,32.22 -50.44,-9.44 -58,-16.99 v1(-58,-20)
dout0_n: J1.10 J3.02 | length 3568.5
  Top Layer w6.89: v1(170,-335) 172.5,-335 182.09,-344.59 182.09,-383.41 182.53,-383.85 182.53,-434.48 178.84,-438.17 178.84,-463.29 J1.10
  Bottom Layer w6.89: v1(170,-335) 170.43,-335 184.17,-321.26 184.17,-257.6 547.11,105.34 547.11,558.45 547.11,561.89 528.33,561.89 528.33,598.78 547.11,598.78 547.11,640 547.11,935 547.11,1062.38 558.7,1073.96 617.03,1073.96 617.03,1110.85 558.7,1110.85 547.11,1122.44 547.11,1135 547.11,2329.66 476.77,2400 363.23,2400 289.91,2326.68 289.91,2265.53 299.21,2256.23 J3.02
dout0_p: J1.08 J3.04 | length 3568.5
  Top Layer w6.89: J1.08 199.11,-463.29 199.11,-438.17 195.42,-434.48 195.42,-378.51 194.98,-378.07 194.98,-342.52 205,-332.5 v1(205,-330)
  Bottom Layer w6.89: v1(205,-330) 205,-328.35 197.06,-320.41 197.06,-262.94 560,100 560,935 560,1057.04 564.04,1061.07 622.37,1061.07 629.92,1068.62 629.92,1116.19 622.37,1123.74 564.04,1123.74 560,1127.78 560,1135 560,2335 482.11,2412.89 357.89,2412.89 277.02,2332.02 277.02,2265.53 267.72,2256.23 J3.04
dout1_n: J2.31 J3.17 | length 3566.7
  Top Layer w6.89: J2.31 -173.23,436.91 -182.53,427.61 -182.53,296.44 -180.04,293.95 -180.04,175.04 v1(-170,165)
  Bottom Layer w6.89: v1(-170,165) -180.04,175.04 -180.04,265.58 -180.04,278.14 -191.63,289.73 -308.34,289.73 -308.34,326.62 -121.86,326.62 -114.31,334.17 -114.31,381.74 -121.86,389.29 -308.34,389.29 -308.34,426.18 -121.86,426.18 -114.31,433.73 -114.31,481.3 -121.86,488.85 -308.34,488.85 -308.34,525.74 -125.93,525.74 -118.38,533.29 -118.38,580.86 -125.93,588.41 -213.41,588.41 -233.59,608.59 -315,690 -315,1526.77 -249.83,1591.94 -240.95,1600.82 -240.95,1617.21 -285.54,1661.79 -259.45,1687.88 -214.86,1643.29 -198.48,1643.29 -88.04,1753.73 -88.04,1776.44 -88.04,1830 -88.04,1890 -88.04,1937.23 -84.01,1941.27 -83.37,1941.27 -78.74,1945.89 J3.17
dout1_p: J2.33 J3.19 | length 3566.7
  Top Layer w6.89: J2.33 -204.72,436.91 -195.42,427.61 -195.42,291.1 -192.93,288.61 -192.93,175.04 v1(-202.98,165)
  Bottom Layer w6.89: v1(-202.98,165) -192.93,175.04 -192.93,265.58 -192.93,272.8 -196.97,276.84 -313.68,276.84 -321.23,284.39 -321.23,331.96 -313.68,339.51 -127.2,339.51 -127.2,376.4 -313.68,376.4 -321.23,383.95 -321.23,431.52 -313.68,439.07 -127.2,439.07 -127.2,475.96 -313.68,475.96 -321.23,483.51 -321.23,531.08 -313.68,538.63 -131.27,538.63 -131.27,575.52 -218.75,575.52 -251.82,608.59 -327.89,684.66 -327.89,1532.11 -258.94,1601.06 -253.84,1606.16 -253.84,1611.87 -298.43,1656.45 -298.43,1667.13 -264.79,1700.77 -254.11,1700.77 -209.52,1656.18 -203.82,1656.18 -100.93,1759.07 -100.93,1789.33 -100.93,1937.23 -104.97,1941.27 -105.61,1941.27 -110.24,1945.89 J3.19
GND: J1.06 J1.07 J1.12 J1.17 J1.18 J1.19 J1.24 J1.29 J1.30 J1.31 J1.33 J1.36 J1.G1 J1.G2 J1.G3 J1.G4 J2.05 J2.06 J2.08 J2.10 J2.11 J2.12 J2.17 J2.22 J2.23 J2.24 J2.29 J2.34 J2.35 J2.G1 J2.G2 J2.G3 J2.G4 J3.G1 J3.G2 J3.G3 J3.G4 J4.2 J4.4 J4.6 J4.8 J4.10 J4.12 J4.14 J4.16 J4.18 pad.M Q1.2 | length 5751
  Top Layer w10: J1.36 -236.22,-587.64 -233.31,-590.55 ; J2.35 -236.22,588.11 -233.78,590.55 ; J2.34 -204.72,598.15 -197.13,590.55 J2.G3@-140,590.55 ; J1.30 -141.73,-582.95 -134.13,-590.55 J1.G3 ; J2.29 -141.73,588.82 J2.G3@-140,590.55 ; J2.G3@-54.84,590.55 J2.G3 J2.G3@-140,590.55 ; J1.G3@-50,-590.55 -47.24,-587.8 J1.24 ; J2.23 -47.24,590.55 -51.04,594.35 -47.24,598.15 J2.24 ; -20,590.55 -15.75,594.8 J2.22 ; J1.G2@45,-590.55 47.24,-588.31 J1.18 ; J2.17 47.24,582.95 54.84,590.55 J2.G2 J2.G2@134.13,590.55 ; J1.G2 134.13,-590.55 141.73,-582.95 J1.12 ; J2.11 141.73,582.95 J2.G2@134.13,590.55 ; J2.12 141.73,598.15 J2.G2@134.13,590.55 ; J2.10 173.23,598.15 J2.G2@165.63,590.55 ; J2.08 204.72,598.15 197.13,590.55 J2.G2@165.63,590.55 ; v1(225,590) 225,587.84 235.92,576.92 235.92,469.2 J2.05 ; 235,590.55 236.22,591.77 J2.06 ; J1.06 236.22,-586.77 240,-590.55 ; J2.G2@134.13,590.55 J2.G2@165.63,590.55
  Top Layer w15: -250,2475 J4.18 ; J1.33 -204.72,-769.72 v1(-204.45,-770) ; J1.31 -173.23,-769.72 v1(-172.95,-770) ; -150,2475 J4.16 ; J1.29 -141.73,-769.72 v1(-141.46,-770) ; J4.14 -50,2480 -45,2475 ; J1.19 15.75,-769.72 v1(16.02,-770) ; 40,2475 42.5,2475 50,2482.5 J4.12 ; J1.17 47.24,-769.72 v1(47.52,-770) ; 135,2480 147.5,2480 150,2482.5 J4.10 ; J1.07 204.72,-769.72 v1(205,-770) ; J4.8 250,2475 255,2470 ; J4.6 350,2480 v1@355,2475 ; J4.4 450,2475 455,2470 ; 550,2475 J4.2 ; Q1.2 765,1333.66 v1(765,1280)
  Top Layer w20: J1.G4 -233.31,-590.55 J1.G3@-134.13,-590.55 ; J2.G4 -233.78,590.55 J2.G3@-197.13,590.55 ; J1.G3 -50,-590.55 v1(0,-590.55) 45,-590.55 J1.G2 ; J2.G3@-54.84,590.55 -47.24,590.55 -20,590.55 J2.G2@54.84,590.55 ; J1.G2@134.13,-590.55 240,-590.55 J1.G1 ; J2.G2@197.13,590.55 197.68,590 v1(225,590) 235.67,590 236.22,590.55 J2.G1
  Bottom Layer w20: J3.G4 J3.G3 J3.G2 J3.G1
  other v1: 250,-590 -370,590 365,590 -350,2095 -160,2095 40,2095 240,2095 -197.57,2475.05 -7.57,2475.05 195,2475 362.43,2475.05 497.43,2475.05
LV_RB: J1.01 J1.03 J1.05 J2.36 J2.38 J2.40 R1.2 | length 5433.9
  Top Layer w10: J2.40 -299.21,764.14 -293.35,770 ; J2.38 -267.72,767.89 ; J2.36 -236.22,764.14 -242.08,770 -293.35,770 ; 485,225 420,225 380,265 260,265 135,140 -430,140 -570,280 -570,580 -437.8,712.2 -407.8,712.2 -350,770 -293.35,770
  Top Layer w15: J1.05 236.22,-761.21 245.01,-770 267.72,-770 ; J1.03 267.72,-769.72 290.28,-769.72 ; J1.01 299.21,-760.79 290.28,-769.72 ; R1.2 603.62,1728.62 575,1700 575,1445 545,1415 390,1415 325,1350 325,1175 400,1100 465,1100 540,1025 540,340 485,285 485,225 485,-725 440.28,-769.72 290.28,-769.72
NetD1_1: D1.1 R1.1 | length 71.4
  Top Layer w6.89: D1.1 R1.1
NetD1_2: D1.2 Q1.3 | length 135.9
  Top Layer w6.89: Q1.3 D1.2
scl: J2.02 J4.20 | length 2611.6
  Top Layer w6.89: J4.20 -350,2415 -570,2195 -570,1295 -300,1025 190,1025 299.21,915.79 J2.02
sda: J2.04 J4.22 | length 2612.2
  Top Layer w6.89: J4.22 -450,2405 -640,2215 -640,1280 -320,960 165,960 267.72,857.28 J2.04
tin0_n: J2.01 J3.06 | length 2439.1
  Top Layer w6.89: v1(220,2360) 204.37,2344.37 204.37,2319.22 177.55,2292.41 177.55,1789.52 280,1687.08 280,1049.63 279.43,1049.06 279.43,1040.57 v1(295,1025) ; J2.01 293.6,463.29 293.6,438.17 289.91,434.48 289.91,384.28 291.18,383.01 291.18,335.03 v1@300,326.21
  Bottom Layer w6.89: J3.06 204.72,2244.71 200.1,2249.34 199.46,2249.34 195.42,2253.37 195.42,2300.16 206.55,2311.29 206.55,2346.45 220,2359.9 v1(220,2360) ; v1(295,1025) 292.5,1025 277.91,1010.41 277.91,685.54 291.18,672.28 291.18,359.02 305.66,344.54 305.66,326.55 v1(307.01,325.2)
tin0_p: J2.03 J3.08 | length 2433.6
  Top Layer w6.89: v1(180.2,2359.8) 180.2,2356.79 191.48,2345.51 191.48,2324.56 164.66,2297.75 164.66,1784.18 267.11,1681.74 267.11,1054.97 266.54,1054.4 266.54,1046.54 v1(250,1030) ; J2.03 273.33,463.29 273.33,438.17 277.02,434.48 277.02,378.94 278.29,377.68 278.29,335.03 269.46,326.21 v1(269.46,325)
  Bottom Layer w6.89: J3.08 173.23,2244.71 177.85,2249.34 178.5,2249.34 182.53,2253.37 182.53,2305.5 193.66,2316.63 193.66,2346.44 180.3,2359.8 v1(180.2,2359.8) ; v1(250,1030) 250,1027.5 265.02,1012.48 265.02,680.2 278.29,666.94 278.29,356.35 269.46,347.53 v1(269.46,325)
tin1_n: J2.19 J3.13 | length 1973.4
  Top Layer w6.89: J2.19 15.75,436.91 6.44,427.61 6.44,318.55 v1(20,305)
  Bottom Layer w6.89: J3.13 15.75,1905 15.75,1855 15.75,1755.75 -130,1610 -130,825 9.44,685.55 9.44,315.55 v1(20,305)
tin1_p: J2.21 J3.15 | length 1978.6
  Top Layer w6.89: J2.21 -15.75,436.91 -6.44,427.61 -6.44,312.56 v1(-14,305)
  Bottom Layer w6.89: J3.15 -11.12,1977.88 -11.12,1939.1 -5.77,1933.75 -5.77,1932.25 2.86,1923.63 2.86,1761.09 -142.89,1615.34 -142.89,819.66 -3.44,680.22 -3.44,315.56 v1(-14,305)
tin2_n: J1.38 J3.21 | length 2879
  Top Layer w6.89: v1(-365.06,872.29) -366.41,872.29 -376.08,862.62 -376.08,798.31 -407.28,767.11 -525,767.11 -640,652.11 -640,-15 -280.71,-374.29 -280.71,-430.79 -273.33,-438.17 -273.33,-463.29 J1.38
  Bottom Layer w6.89: v1(-365.06,872.29) -365.06,874.83 -377.46,887.23 -377.46,1672.54 -184.72,1865.28 -184.72,1926.22 -177.85,1933.09 -177.85,1977.88 J3.21
tin2_p: J1.40 J3.23 | length 2879.7
  Top Layer w6.89: v1(-400,875) -400,873.65 -388.97,862.62 -388.97,803.65 -412.62,780 -530.34,780 -652.89,657.45 -652.89,-20.34 -293.6,-379.63 -293.6,-463.29 J1.40
  Bottom Layer w6.89: v1(-400,875) -390.35,884.65 -390.35,1677.88 -266.61,1801.61 -264.18,1804.05 -266.84,1806.71 -240.75,1832.79 -238.09,1830.14 -224.11,1844.11 -197.61,1870.61 -197.61,1938.78 -204.72,1945.89 J3.23
tin3_n: J1.22 J3.26 | length 3570.9
  Top Layer w6.89: v1(-575.95,132.45) -551.9,132.45 -328.59,-90.85 -232.38,-90.85 -6.44,-316.78 -6.44,-434.48 -10.14,-438.17 -10.14,-463.29 J1.22
  Bottom Layer w6.89: v1(-575.95,132.45) -575.95,135.46 -582.72,142.22 -582.72,148.5 -582.89,148.67 -582.89,2307.11 -502.11,2387.89 -347.89,2387.89 -277.02,2317.02 -277.02,2253.37 -272.98,2249.34 -272.34,2249.34 -267.72,2244.71 J3.26
tin3_p: J1.20 J3.28 | length 3556.8
  Top Layer w6.89: v1(-549.68,159.8) -530.61,140.72 -530.61,129.39 -323.25,-77.96 -227.04,-77.96 6.44,-311.44 6.44,-434.48 10.14,-438.17 10.14,-463.29 J1.20
  Bottom Layer w6.89: v1(-549.68,159.8) -570,180.12 -570,1685 -570,1725.34 -548.64,1725.34 -548.64,1762.23 -570,1762.23 -570,1775 -570,2301.77 -496.77,2375 -353.23,2375 -289.91,2311.68 -289.91,2253.37 -293.95,2249.34 -294.59,2249.34 -299.21,2244.71 J3.28
pads on no net: J1. J2. J3. J4.1 J4.3 J4.5 J4.7 J4.9 J4.11 J4.13 J4.15 J4.17 J4.19 J4.21 J4.23
copper on no net: | length 1474.3
  Top Layer w7: 651.34,-710.16 770.91,-710.16 ; 651.34,-627.48 770.91,-627.48 ; 651.34,-552.68 770.91,-552.68 ; 770.91,-710.16 770.91,-788.9 651.34,-788.9 651.34,-473.94 770.91,-473.94 770.91,-552.68 ; 770.91,-710.16 770.91,-627.48 ; 770.91,-627.48 770.91,-552.68
  Top Layer w10: 683.03,-505.59 683.03,-525.59 683.03,-515.59 743.03,-515.59 733.03,-505.59
  Bottom Layer w10: 685,-760 745,-760 715,-730 715,-770

## Polygon pours and split planes (outlines as drawn)
GND on Internal Plane 2 "GND_L03_P000" (solid, pour order 0): -835,-1100 835,-1100 835,3285 -835,3285
GND on Internal Plane 1 "GND_L02_P001" (solid, pour order 1): -835,-1100 835,-1100 835,3285 -835,3285

## Other copper
Top Layer:
  rectangle net GND: -280,2460 575,2490
  text "ETROC Emulator Adapter / 2023/01/03 ap  BU EDF" at 645,260 h40 r270
  text "Emulator Adapter / '.Layer_Name'     / '.Print_Date'  / JLC7628 Stackup" at -840,-1570 h60
Internal Plane 1:
  pour cut-out: 631.34,-473.94 774.96,-473.94 774.96,-792.44 631.34,-792.44
  text "2" at 681.34,-572.44 h60 r270
  text "'.Pcb_File_Name_No_Path' / '.Layer_Name'     / '.Print_Date'  / JLC7628 Stackup" at -840,-1570 h60
Internal Plane 2:
  pour cut-out: 633.66,-473.94 770.91,-473.94 770.91,-792.44 633.66,-792.44
  text "3" at 681.34,-647.44 h60 r270
  text "'.Pcb_File_Name_No_Path' / '.Layer_Name'     / '.Print_Date'  / JLC7628 Stackup" at -840,-1570 h60
Bottom Layer:
  text "'.Pcb_File_Name_No_Path' / '.Layer_Name'     / '.Print_Date'  / JLC7628 Stackup" at -840,-1570 h60
  text "'.Pcb_File_Name_No_Path' / '.Layer_Name'     / '.Print_Date'  / JLC7628 Stackup" at -840,-1570 h60

## Silkscreen, mask and mechanical layers (free items; w line width, h text height)
Top Overlay:
  text "'.Pcb_File_Name_No_Path' / '.Layer_Name'     / '.Print_Date'  / JLC7628 Stackup" at -840,-1567.45 h60
Bottom Overlay:
  text "'.Pcb_File_Name_No_Path' / '.Layer_Name'     / '.Print_Date'  / JLC7628 Stackup" at -840,-1570 h60
Top Solder:
  region: 651.34,-473.94 651.34,-788.9 770.91,-788.9 770.91,-473.94
Mechanical 14:
  lines w4.02: -848.42,-1112.68 -848.42,3296.77 848.43,3296.77 848.43,-1112.68 -848.42,-1112.68
  lines w5.98: -1027.75,928.07 -1037.75,938.07 -977.79,938.07 -977.79,948.07 -977.79,928.07 ; -1027.75,978.03 -1037.75,988.03 -977.79,988.03 -977.79,998.03 -977.79,978.03 ; -1027.75,1028.03 -1037.75,1038.03 -1037.75,1058.03 -1027.75,1068.03 -1017.79,1068.03 -977.79,1028.03 -977.79,1068.03 ; -1027.75,1137.99 -1037.75,1147.99 -977.79,1147.99 -977.79,1157.99 -977.79,1137.99 ; -115.98,3378.89 -115.98,3438.85 -145.94,3408.89 -105.98,3408.89 ; -85.98,3388.89 -75.98,3378.89 -55.98,3378.89 -45.98,3388.89 -45.98,3398.89 -55.98,3408.89 ; -85.98,3428.85 -75.98,3438.85 -55.98,3438.85 -45.98,3428.85 -45.98,3418.89 -55.98,3408.89 ; 23.98,3378.89 43.98,3378.89 33.98,3378.89 33.98,3438.85 23.98,3428.85 ; -55.98,3408.89 -65.98,3408.89 -55.98,3408.89 ; -1037.75,1197.99 -1037.75,1217.95 -1027.75,1227.95 -987.79,1227.95 -977.79,1217.95 -977.79,1197.99 -987.79,1187.99 -1027.75,1187.99 -1037.75,1197.99 ; -987.79,1088.03 -987.79,1097.99 -977.79,1097.99 -977.79,1088.03 -987.79,1088.03 ; -25.98,3378.89 -15.98,3378.89 -15.98,3388.89 -25.98,3388.89 -25.98,3378.89 ; 73.98,3388.89 73.98,3428.85 83.98,3438.85 103.98,3438.85 113.98,3428.85 113.98,3388.89 103.98,3378.89 83.98,3378.89 73.98,3388.89
  lines w10: -1033.78,-1052.68 -1013.78,-1112.68 ; -1033.78,3240.71 -1013.78,3300.71 ; -1023.78,-1112.68 -852.36,-1112.68 ; -1023.78,3300.71 -848.42,3300.71 -848.42,3424.88 ; -1013.78,912.04 -1013.78,-1112.68 ; -1013.78,1243.97 -1013.78,3300.71 ; -993.78,-1052.68 -1013.78,-1112.68 ; -993.78,3240.71 -1013.78,3300.71 ; -788.42,3394.88 -848.42,3414.88 ; -788.42,3434.88 -848.42,3414.88 ; -161.97,3414.88 -848.42,3414.88 ; 129.96,3414.88 848.43,3414.88 ; 788.43,3394.88 848.43,3414.88 ; 788.43,3434.88 848.43,3414.88 ; 848.43,3296.77 848.43,3424.88
  text "'.Pcb_File_Name_No_Path' / '.Layer_Name'     / '.Print_Date'  / JLC7628 Stackup" at -840,-1570 h60